# EAGLE board druckversion (EAGLE 6.5.0)
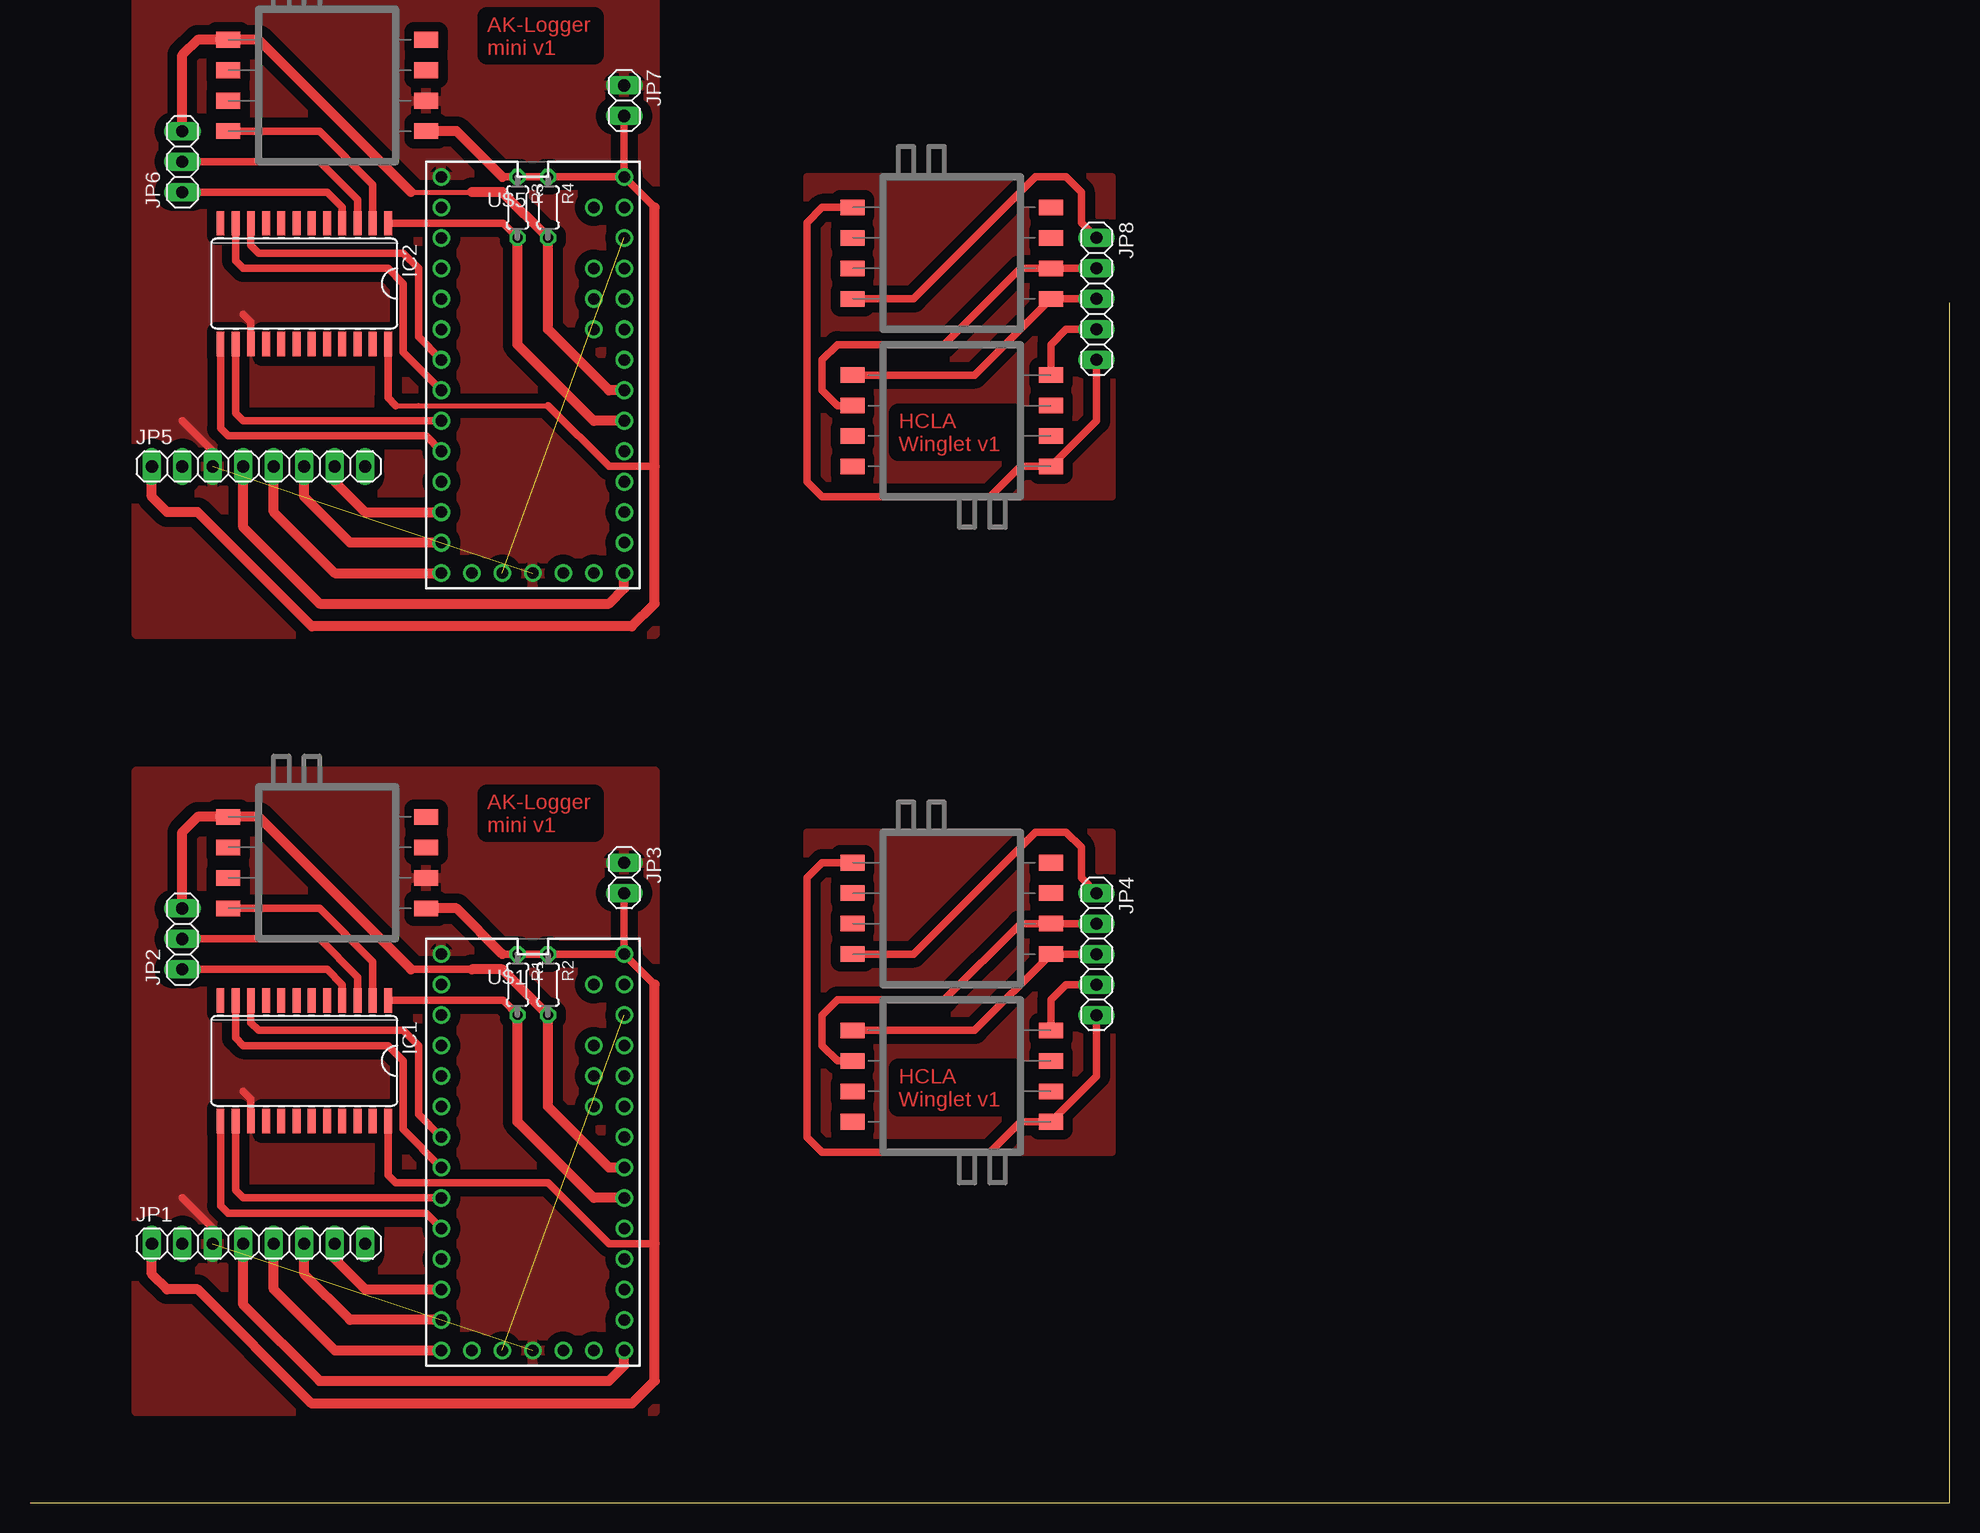
[diagram p0: board, top side]

Size 160 x 100 mm. Coordinates in mm from the lower left corner, seen from the top.
Outline: 0,0 160,0 160,100
Copper layers (1*16): Top 0.035mm / dielectric 1.5mm / Bottom 0.035mm
Design rules "default": minimum track width 10mil, minimum drill 24mil, track to track 8mil, track to pad 8mil, pad to pad 8mil, via to via 8mil, smd to smd 8mil, copper to edge 40mil, drill to drill 8mil, minimum pad ring 10mil, minimum via ring 8mil, stop-mask expansion 4mil, vias tented up to drill 0mil, thermal gap 10mil

## Footprints (pad centres in the part's own frame; a part is rotated, then mirrored left to right if it is on the bottom)
SO24W = smd 0.66 x 2.032: 1 -6.985,-5.029; 2 -5.715,-5.029; 3 -4.445,-5.029; 4 -3.175,-5.029; 5 -1.905,-5.029; 6 -0.635,-5.029; 7 0.635,-5.029; 8 1.905,-5.029; 9 3.175,-5.029; 10 4.445,-5.029; 11 5.715,-5.029; 12 6.985,-5.029; 13 6.985,5.029; 14 5.715,5.029; 15 4.445,5.029; 16 3.175,5.029; 17 1.905,5.029; 18 0.635,5.029; 19 -0.635,5.029; 20 -1.905,5.029; 21 -3.175,5.029; 22 -4.445,5.029; 23 -5.715,5.029; 24 -6.985,5.029
1X08 = drill 1.016 long: 1 -8.89,0; 2 -6.35,0; 3 -3.81,0; 4 -1.27,0; 5 1.27,0; 6 3.81,0; 7 6.35,0; 8 8.89,0
1X03 = drill 1.016 long: 1 -2.54,0; 2 0,0; 3 2.54,0
1X02 = drill 1.016 long: 1 -1.27,0; 2 1.27,0
1X05 = drill 1.016 long: 1 -5.08,0; 2 -2.54,0; 3 0,0; 4 2.54,0; 5 5.08,0
0204/5 = drill 0.813 octagon: 1 -2.54,0; 2 2.54,0
TEENSY_3.0+4 = drill 0.965: 0 -7.62,13.97; 1 -7.62,11.43; 2 -7.62,8.89; 3 -7.62,6.35; 3.3V 7.62,11.43; 3.3V1 -2.54,-16.51; 4 -7.62,3.81; 5 -7.62,1.27; 6 -7.62,-1.27; 7 -7.62,-3.81; 8 -7.62,-6.35; 9 -7.62,-8.89; 10 -7.62,-11.43; 11 -7.62,-13.97; 12 -7.62,-16.51; 13 7.62,-16.51; 14/A0 7.62,-13.97; 15/A1 7.62,-11.43; 16/A2 7.62,-8.89; 17/A3 7.62,-6.35; 18/A4 7.62,-3.81; 19/A5 7.62,-1.27; 20/A6 7.62,1.27; 21/A7 7.62,3.81; 22/A8 7.62,6.35; 23/A9 7.62,8.89; A10 5.08,6.35; A11 5.08,3.81; AGND 7.62,13.97; AREF 5.08,8.89; GND -7.62,16.51; GND1 0,-16.51; PGM 2.54,-16.51; RESET 5.08,-16.51; VBAT -5.08,-16.51; VIN 7.62,16.51; VUSB 5.08,13.97
HCLA = smd 1.3 x 2: P$1 -3.81,-7.62; P$2 -1.27,-7.62; P$3 1.27,-7.62; P$4 3.81,-7.62; P$5 3.81,8.89; P$6 1.27,8.89; P$7 -1.27,8.89; P$8 -3.81,8.89

## Placement (x,y rotation side)
IC1  4067D  [SO24W]  22.86,36.83 180 top
IC2  4067D  [SO24W]  22.86,101.6 180 top
JP1  [1X08]  19.05,21.59 0 top
JP2  [1X03]  12.7,46.99 90 top
JP3  [1X02]  49.53,52.07 270 top
JP4  [1X05]  88.9,45.72 270 top
JP5  [1X08]  19.05,86.36 0 top
JP6  [1X03]  12.7,111.76 90 top  (outside the outline)
JP7  [1X02]  49.53,116.84 270 top  (outside the outline)
JP8  [1X05]  88.9,100.33 270 top
R1  1,5  [0204/5]  40.64,43.18 270 top
R2  1,5k  [0204/5]  43.18,43.18 270 top
R3  1,5  [0204/5]  40.64,107.95 270 top  (outside the outline)
R4  1,5k  [0204/5]  43.18,107.95 270 top  (outside the outline)
U$1  TEENSY_3.0+4  [TEENSY_3.0+4]  41.91,29.21 0 top
U$2  HCLA  [HCLA]  25.4,53.34 90 top
U$3  HCLA  [HCLA]  76.2,35.56 270 top
U$4  HCLA  [HCLA]  77.47,49.53 90 top
U$5  TEENSY_3.0+4  [TEENSY_3.0+4]  41.91,93.98 0 top
U$6  HCLA  [HCLA]  25.4,118.11 90 top  (outside the outline)
U$7  HCLA  [HCLA]  76.2,90.17 270 top
U$8  HCLA  [HCLA]  77.47,104.14 90 top

## Library data of the parts
IC1 IC2 = 40xx
JP1-JP8 = pinhead
R1-R4 = rcl
U$1 U$5 = Teensy3.0
U$2-U$4 U$6-U$8 = HCLA

## Nets
3.3V: U$1.3.3V U$1.3.3V1
3.3V1: U$5.3.3V U$5.3.3V1
AGND: U$1.AGND
AGND1: U$5.AGND
AREF: U$1.AREF
AREF1: U$5.AREF
GND: IC1.15 JP1.3 JP3.1 U$1.GND U$1.GND1 U$2.P$2
GND1: IC2.15 JP5.3 JP7.1 U$5.GND U$5.GND1 U$6.P$2
N$1: IC1.10 U$1.5
N$2: IC1.11 U$1.6
N$3: IC1.14 U$1.7
N$4: IC1.13 U$1.8
N$5: JP1.7 U$1.10
N$6: JP1.6 U$1.11
N$7: JP1.5 U$1.12
N$8: JP1.4 U$1.13
N$9: JP4.5 U$3.P$5 U$4.P$5
N$10: IC1.4 JP2.1
N$11: IC1.3 JP2.2
N$12: JP4.3 U$3.P$1 U$4.P$1
N$13: JP4.2 U$3.P$2 U$4.P$2
N$14: JP4.4 U$3.P$8
N$15: JP4.1 U$4.P$8
N$17: IC2.10 U$5.5
N$18: IC2.11 U$5.6
N$19: IC2.14 U$5.7
N$20: IC2.13 U$5.8
N$21: JP5.7 U$5.10
N$22: JP5.6 U$5.11
N$23: JP5.5 U$5.12
N$24: JP5.4 U$5.13
N$25: IC2.4 JP6.1
N$26: IC2.3 JP6.2
N$27: JP8.5 U$7.P$5 U$8.P$5
N$28: JP8.3 U$7.P$1 U$8.P$1
N$29: JP8.2 U$7.P$2 U$8.P$2
N$30: JP8.4 U$7.P$8
N$31: JP8.1 U$8.P$8
SCL: JP2.3 R2.2 U$1.19/A5 U$2.P$5
SCL1: JP6.3 R4.2 U$5.19/A5 U$6.P$5
SDA: IC1.1 R1.2 U$1.18/A4
SDA0: IC1.2 U$2.P$8
SDA1: IC2.2 U$6.P$8
SDA2: IC2.1 R3.2 U$5.18/A4
VBAT: U$1.VBAT
VBAT1: U$5.VBAT
VDD: IC1.24 JP1.1 JP3.2 R1.1 R2.1 U$1.VIN U$2.P$1
VDD1: IC2.24 JP5.1 JP7.2 R3.1 R4.1 U$5.VIN U$6.P$1
VSS: IC1.12
VSS1: IC2.12
VUSB: U$1.VUSB
VUSB1: U$5.VUSB

## Tracks (layer width: path | path; a pad name or v marks a point on that pad's centre or on a via)
3.3V  (1 unrouted)
3.3V1  (1 unrouted)
GND  (1 unrouted)
  Top 0.61: IC1.15 18.41,33.66 17.78,34.29 | JP1.3 15.24,22.86 12.7,25.4
  pour Top (isolate 0.813): 52.07,7.62 8.89,7.62 8.89,60.96 52.07,60.96
GND1  (1 unrouted)
  Top 0.61: IC2.15 18.41,98.42 17.78,99.06 | JP5.3 15.24,87.63 12.7,90.17
  pour Top (isolate 0.813): 52.07,72.39 8.89,72.39 8.89,125.73 52.07,125.73
N$1
  Top 0.61: U$1.5 32.38,32.38 32.38,38.1 31.11,39.37 19.05,39.37 18.41,40.01 IC1.10
N$2
  Top 0.61: U$1.6 31.11,31.11 31.11,36.83 29.84,38.1 17.78,38.1 17.14,38.73 IC1.11
N$3
  Top 0.61: U$1.7 17.78,25.4 17.14,26.04 IC1.14
N$4
  Top 0.61: U$1.8 33.02,24.13 16.51,24.13 15.88,24.77 IC1.13
N$5
  Top 0.813: U$1.10 27.94,17.78 25.4,20.32 JP1.7
N$6
  Top 0.813: U$1.11 26.67,15.24 22.86,19.05 JP1.6
N$7
  Top 0.813: U$1.12 25.4,12.7 20.32,17.78 JP1.5
N$8
  Top 0.813: U$1.13 49.53,11.43 48.26,10.16 24.13,10.16 17.78,16.51 JP1.4
N$9
  Top 0.61: JP4.5 88.9,35.56 U$3.P$5 82.55,31.75 80.01,29.21 66.04,29.21 64.77,30.48 64.77,52.07 66.04,53.34 U$4.P$5
N$10
  Top 0.61: JP2.1 24.77,44.45 26.04,43.18 IC1.4
N$11
  Top 0.61: JP2.2 24.13,46.99 27.3,43.81 IC1.3
N$12
  Top 0.61: U$3.P$1 78.74,39.37 U$4.P$1 JP4.3
N$13
  Top 0.61: U$3.P$2 67.31,36.83 66.04,38.1 66.04,40.64 67.31,41.91 76.2,41.91 82.55,48.26 U$4.P$2 JP4.2
N$14
  Top 0.61: U$3.P$8 85.09,41.91 86.36,43.18 JP4.4
N$15
  Top 0.61: U$4.P$8 73.66,45.72 83.82,55.88 86.36,55.88 87.63,54.61 87.63,52.07 JP4.1
N$16
  pour Top (isolate 0.813): 64.77,29.21 90.17,29.21 90.17,55.88 64.77,55.88
N$17
  Top 0.61: U$5.5 32.38,97.16 32.38,102.87 31.11,104.14 19.05,104.14 18.41,104.78 IC2.10
N$18
  Top 0.61: U$5.6 31.11,95.89 31.11,101.6 29.84,102.87 17.78,102.87 17.14,103.5 IC2.11
N$19
  Top 0.61: U$5.7 17.78,90.17 17.14,90.81 IC2.14
N$20
  Top 0.61: U$5.8 33.02,88.9 16.51,88.9 15.88,89.53 IC2.13
N$21
  Top 0.813: U$5.10 27.94,82.55 25.4,85.09 JP5.7
N$22
  Top 0.813: U$5.11 26.67,80.01 22.86,83.82 JP5.6
N$23
  Top 0.813: U$5.12 25.4,77.47 20.32,82.55 JP5.5
N$24
  Top 0.813: U$5.13 49.53,76.2 48.26,74.93 24.13,74.93 17.78,81.28 JP5.4
N$25
  Top 0.61: JP6.1 24.77,109.22 26.04,107.95 IC2.4
N$26
  Top 0.61: JP6.2 24.13,111.76 27.3,108.58 IC2.3
N$27
  Top 0.61: JP8.5 88.9,90.17 U$7.P$5 82.55,86.36 80.01,83.82 66.04,83.82 64.77,85.09 64.77,106.68 66.04,107.95 U$8.P$5
N$28
  Top 0.61: U$7.P$1 78.74,93.98 U$8.P$1 JP8.3
N$29
  Top 0.61: U$7.P$2 67.31,91.44 66.04,92.71 66.04,95.25 67.31,96.52 76.2,96.52 82.55,102.87 U$8.P$2 JP8.2
N$30
  Top 0.61: U$7.P$8 85.09,96.52 86.36,97.79 JP8.4
N$31
  Top 0.61: U$8.P$8 73.66,100.33 83.82,110.49 86.36,110.49 87.63,109.22 87.63,106.68 JP8.1
N$32
  pour Top (isolate 0.813): 64.77,83.82 90.17,83.82 90.17,110.49 64.77,110.49
SCL
  Top 0.61: 31.75,44.45 36.83,44.45
  Top 0.813: U$1.19/A5 48.26,27.94 43.18,33.02 R2.2 39.37,44.45 36.83,44.45 | 31.75,44.45 19.05,57.15 U$2.P$5 13.97,57.15 12.7,55.88 JP2.3
SCL1
  Top 0.406: 31.75,109.22 36.83,109.22
  Top 0.813: U$5.19/A5 48.26,92.71 43.18,97.79 R4.2 39.37,109.22 36.83,109.22 | 31.75,109.22 19.05,121.92 U$6.P$5 13.97,121.92 12.7,120.65 JP6.3
SDA
  Top 0.61: R1.2 39.42,41.86 IC1.1
  Top 0.813: R1.2 40.64,31.75 46.99,25.4 U$1.18/A4
SDA0
  Top 0.406: 22.86,49.53 U$2.P$8
  Top 0.61: U$2.P$8 24.13,49.53 28.57,45.09 IC1.2
SDA1
  Top 0.406: 22.86,114.3 U$6.P$8
  Top 0.61: U$6.P$8 24.13,114.3 28.57,109.86 IC2.2
SDA2
  Top 0.61: R3.2 39.42,106.63 IC2.1
  Top 0.813: R3.2 40.64,96.52 46.99,90.17 U$5.18/A4
VDD  (1 unrouted)
  Top 0.406: 32.38,26.67 43.18,26.67
  Top 0.61: IC1.24 29.84,27.3 30.48,26.67 43.18,26.67 48.26,21.59 52.07,21.59 | U$1.VIN 52.07,43.18 | U$1.VIN R1.1 39.37,45.72 | JP3.2 U$1.VIN
  Top 0.813: 39.37,45.72 35.56,49.53 U$2.P$1 | 52.07,43.18 52.07,21.59 52.07,10.16 50.16,8.26 23.5,8.26 13.97,17.78 11.43,17.78 10.16,19.05 JP1.1 10.16,20.32
VDD1  (1 unrouted)
  Top 0.406: 32.38,91.44 43.18,91.44 30.48,91.44
  Top 0.61: IC2.24 29.84,92.08 30.48,91.44 | 43.18,91.44 48.26,86.36 52.07,86.36 | U$5.VIN 52.07,107.95 | U$5.VIN R3.1 39.37,110.49 | JP7.2 U$5.VIN
  Top 0.813: 39.37,110.49 35.56,114.3 U$6.P$1 | 52.07,107.95 52.07,86.36 52.07,74.93 50.16,73.03 23.5,73.03 13.97,82.55 11.43,82.55 10.16,83.82 JP5.1 10.16,85.09

## Text on the board
Top: AK-Logger / mini v1 | HCLA / Winglet v1 | AK-Logger / mini v1 | HCLA / Winglet v1
_tNames: JP3 | JP4 | R1 | R2 | JP2 | U$1 | IC1 | JP1